# Altium PCB SIM7020_mp2128.PcbDoc (part 2 of 3)
Units mm, origin at the board's own origin, x right, y up, seen from the top; angles counter-clockwise.
Board outline 43.61 x 60.15 mm, 2 copper layers (Top Layer, Bottom Layer); 76 components, 59 nets, 247 pads, 355 vias.
Unrouted connection lines stored in the file: 2.
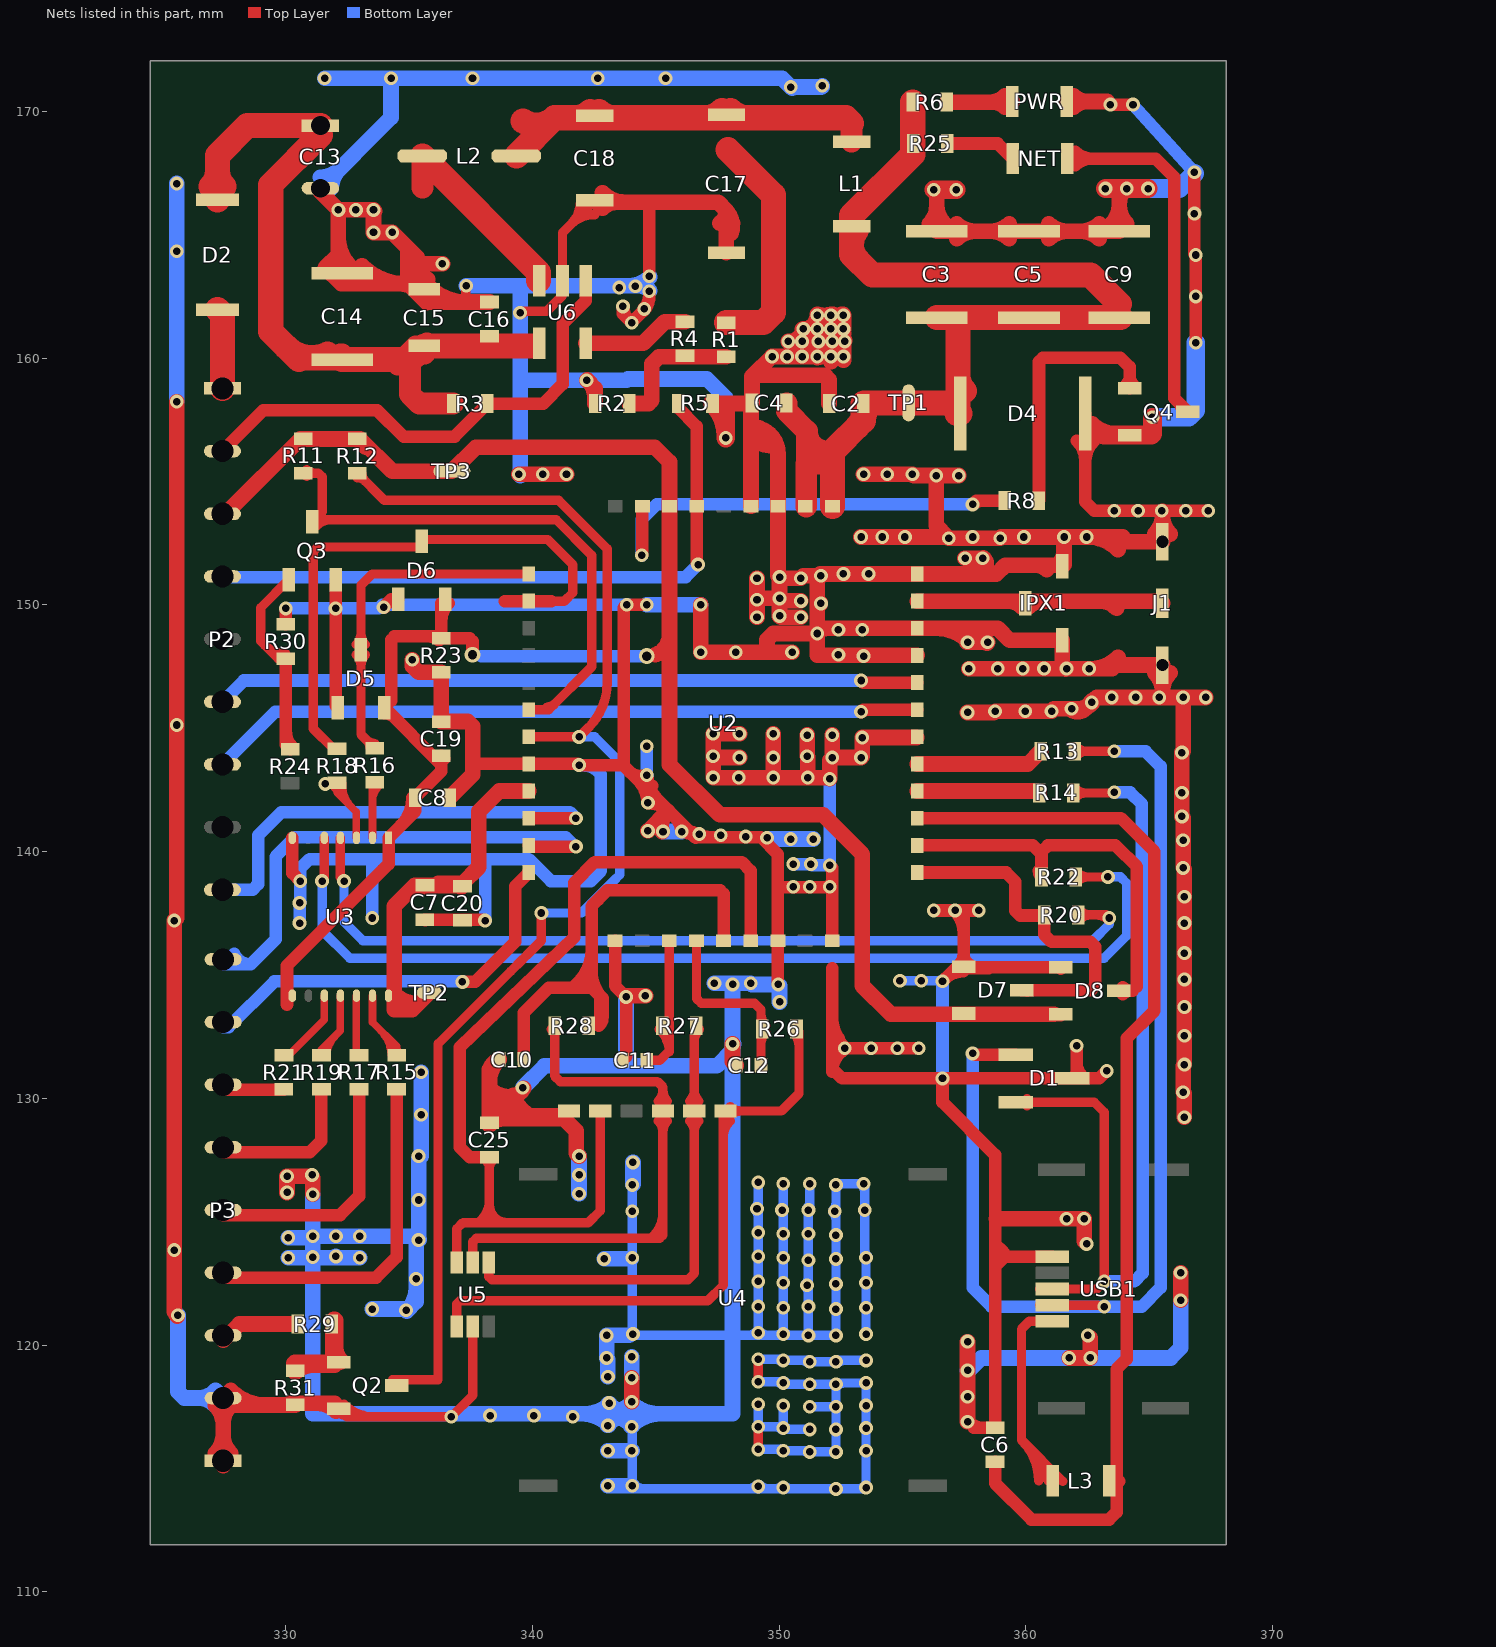
[diagram p2: the nets of this part, all layers, seen from the top]

## Via types
v1: diameter 0.559, hole 0.305, Top Layer to Bottom Layer, 353 vias
v2: diameter 0.635, hole 0.381, Top Layer to Bottom Layer, 2 vias

## Nets (pads, with @x,y where several pads share a name; then routed paths per layer and width w, separated by ;. In a path a pad name is that pad's centre, name@x,y a point inside that pad or via, vN(x,y) a via of type N, cw(c..) or ccw(c..) an arc to the next point about the centre after c; other vN are vias at no path point) (continued)
GND: C2.1 C3.2 C4.1 C5.2 C6.2 C7.2 C8.2 C9.2 C10.2 C11.1 C12.1 C13.2 C14.2 C15.2 C16.1 C17.2 C18.1 C19.2 C20.2 C25.1 D1.3 D4.1 D5.1 D6.1 D7.1 D8.1 IPX1.1 IPX1.3 J1.2 P3.1 P3.2 PWR.2 Q2.1 Q3.1 Q4.1 R2.2 R5.1 R23.1 R30.2 R31.1 U2.8 U2.13 U2.19 U2.21 U2.27 U2.30 U2.31 U2.33 U2.36 U2.37 U3.7 U4.1 U5.2 U6.2 USB1.5 | length 855.7
  Top Layer w0.381: Q2.1@331.971,117.643 Q2.1@332.012,117.602 ; Q2.1@332.088,117.328 ccw(c332.653,117.893) 332.653,117.094 ; Q2.1@332.358,117.597 ccw(c333.573,118.813) 333.573,117.094 ; 332.469,117.094 v1(336.707,117.094) 337.581,117.968 U5.2@337.581,120.752 ; 337.287,162.281 v1@337.287,162.738 ; v1@339.496,161.9 340.563,161.9 341.213,162.55 U6.2@341.213,163.144 341.213,165.09 C18.1@342.519,166.395 ; v1@339.559,161.786 cw(c339.834,161.512) 339.834,161.9 ; C18.1@341.947,166.395 cw(c340.568,166.395) 341.543,165.42 cw(c342.519,164.444) 342.519,165.824 ; v1(349.148,115.773) v1(349.148,116.688) ; v1(349.148,118.516) v1(349.148,119.431)
  Top Layer w0.508: R30.2@329.998,149.212 v1@329.998,149.858 ; U3.7@330.262,140.564 330.262,139.13 v1(330.581,138.811) ; Q3.1@332.014,151.022 v1(332.014,149.86) 332.014,145.921 D5.1@332.095,145.84 ; v1(333.959,149.911) 334.283,150.234 D6.1@334.559,150.234 ccw(c334.559,149.571) v1@333.981,149.898 ; C7.2@335.659,137.224 C7.2@335.634,137.249 v1@338.036,137.249 ; 337.718,143.561 337.722,143.557 U2.8@339.852,143.557 v1@341.837,143.557 ; C25.1@338.252,129.007 C25.1@338.252,129.083 ; C25.1@338.328,129.235 338.404,129.235 338.772,129.603 ; C25.1@338.379,129.007 cw(c338.869,129.007) 338.522,129.353 ; 338.582,129.997 ccw(c339.073,129.997) 338.726,129.65 338.772,129.603 ; v1(339.598,130.429) 339.23,130.061 338.772,129.603 ; v1(341.884,143.51) 343.662,143.51 ; U2.13@343.344,136.398 343.344,134.557 v1(343.789,134.112) 343.789,131.699 C11.1@343.637,131.547 ; v1(343.662,162.103) 343.662,161.798 v1(344.018,161.442) ; v1@343.687,162.1 ccw(c344.304,162.033) v1@343.865,161.595 ; 343.69,149.38 343.69,149.098 ; 343.941,143.231 ccw(c344.35,143.639) v1@344.616,143.126 ; 344.145,143.104 ccw(c344.329,143.104) 344.198,142.974 ; 344.275,142.897 cw(c343.365,141.986) v1@344.653,141.986 ; 344.432,142.74 ccw(c344.685,142.992) 344.849,142.675 ; v1@344.508,162.019 ccw(c343.974,162.553) v1@344.729,162.553 ; v1@344.509,162.021 ccw(c344.114,162.492) v1@344.729,162.492 ; v1@344.526,161.95 v1(344.018,161.442) ; v1(344.627,150.012) v1(343.814,150.012) 343.69,149.888 343.69,149.098 ; v1@344.653,143.104 ccw(c346.063,143.104) 345.066,142.106 ; v1@344.678,141.961 cw(c344.678,140.673) 345.589,141.583 ; v1(344.729,162.712) v1@344.729,162.492 ; v1(344.729,163.322) 344.729,166.268 ; 345.791,141.381 cw(c345.227,140.818) v1@346.024,140.818 ; v1@346.05,140.792 cw(c346.05,139.995) v1@346.613,140.559 ; v1@346.197,140.975 ccw(c346.761,141.539) v1@346.761,140.741 ; v1@346.779,140.734 ccw(c347.129,141.084) 347.129,140.589 ; v1@349.944,134.638 U2.19@349.944,136.398 349.944,139.895 349.25,140.589 346.583,140.589 343.662,143.51 ; 350.012,138.557 v1@351.917,138.557 ; v1@352.026,138.564 cw(c351.742,138.281) 352.144,138.281 ; v1@352.026,138.6 ccw(c351.742,138.884) 352.144,138.884 ; v1@352.026,139.428 cw(c351.742,139.144) 352.144,139.144 ; 352.144,131.071 cw(c353.243,131.071) v1@352.667,132.008 ; 352.144,131.98 cw(c352.684,131.98) 352.401,132.44 ; 352.144,132.095 ccw(c352.72,132.095) 352.312,131.688 ; 352.144,133.322 ccw(c353.946,133.322) v1@352.672,132.047 ; 352.144,135.282 352.144,132.029 ; U2.21@352.144,136.398 v1@352.144,139.346 ; v1(355.651,132.029) v1(354.787,132.029) v1(353.72,132.029) v1(352.654,132.029) 352.144,132.029 ; v1(356.26,137.617) v1(357.124,137.617) v1(358.089,137.617) ; v1(356.616,134.747) 357.185,135.316 361.359,135.316 D8.1@361.41,135.265 ; v1@356.708,134.839 cw(c357.448,134.099) D7.1@357.448,135.145 ; v1@357.106,137.599 cw(c356.22,136.713) 357.473,136.713 ; D7.1@357.334,135.48 ccw(c357,135.815) 357.473,135.815 ccw(c357.946,135.815) D7.1@357.612,135.48 ; D7.1@357.473,135.341 357.473,137.509 ; v1@357.65,116.909 ccw(c358.276,117.535) 358.276,116.649 ; D7.1@357.735,135.282 358.494,135.282 ; 357.873,116.649 C6.2@358.751,116.649 358.751,123.192 ; 358.033,135.316 cw(c358.033,135.876) 357.637,135.48 ccw(c358.114,135.957) 358.114,135.282 ; USB1.5@361.061,123.583 359.142,123.583 ; 362.052,131.454 ccw(c362.835,131.454) D1.3@362.281,130.9 ; v1(362.052,132.131) 362.052,130.988 D1.3@361.874,130.81 ; 362.056,156.659 cw(c361.21,155.812) 362.407,155.812 cw(c363.605,155.812) 362.758,156.659 ; D4.1@362.407,157.759 362.407,154.178 362.763,153.822 v1(363.576,153.822) v1(364.541,153.822) v1(365.506,153.822) v1(366.471,153.822) v1(367.386,153.822) ; v1(363.271,131.115) 362.966,130.81 D1.3@361.874,130.81 ; v1(363.423,170.282) v1(364.338,170.282) ; v1@366.827,164.236 v1(366.827,165.862) v1(366.827,167.538) ; v1(366.878,160.63) v1(366.878,162.509) v1(366.878,164.186) ; 343.662,143.51 343.69,143.538 343.69,149.098 ; v1(344.018,161.442) cw(c344.14,161.442) v1@344.054,161.529 ; v1(344.018,161.442) cw(c344.14,161.442) v1@344.054,161.529 ; v1(344.018,161.442) cw(c344.14,161.442) v1@344.054,161.529 ; v1(344.018,161.442) cw(c344.14,161.442) v1@344.054,161.529 ; v1(344.018,161.442) cw(c344.14,161.442) v1@344.054,161.529 ; v1(344.018,161.442) cw(c344.14,161.442) v1@344.054,161.529 ; v1(344.018,161.442) cw(c344.14,161.442) v1@344.054,161.529 ; v1@344.49,161.914 ccw(c344.403,162.001) v1(344.526,162.001) ; v1@344.49,161.914 ccw(c344.403,162.001) v1(344.526,162.001) ; v1@344.49,161.914 ccw(c344.403,162.001) v1(344.526,162.001) ; v1@344.49,161.914 ccw(c344.403,162.001) v1(344.526,162.001) ; v1@344.49,161.914 ccw(c343.912,162.492) v1@344.729,162.492 ; 352.144,132.029 352.144,131.218 352.552,130.81 v1(356.616,130.81) ; v1(356.616,130.81) 356.616,129.845 358.751,127.71 358.751,124.104 ; v1(356.616,130.81) D1.3@361.874,130.81 ; 358.751,123.192 359.142,123.583 ; 358.751,123.192 358.751,124.104 ; 358.751,124.104 359.05,123.805 cw(c358.828,123.583) 359.142,123.583
  Top Layer w0.635: v1@325.476,121.361 v1(325.476,123.85) v1(325.476,137.211) ; 325.476,121.485 ccw(c325.904,121.485) v1@325.601,121.182 ; v1@325.577,137.312 v1(325.577,145.136) v1(325.577,158.242) ; 327.151,115.622 ccw(c326.413,116.36) 327.457,116.36 ccw(c328.501,116.36) 327.763,115.622 ; 327.151,117.55 cw(c326.413,116.812) 327.457,116.812 cw(c328.501,116.812) 327.763,117.55 ; P3.1@327.457,115.113 327.457,117.653 327.533,117.577 R31.1@330.378,117.577 ; 327.763,118.162 ccw(c329.175,119.575) 329.175,117.577 ; v1(330.048,126.187) v1(330.048,126.848) v1@331.013,126.848 ; R31.1@330.164,117.643 Q2.1@331.971,117.643 ; v1(331.089,126.111) v1@331.089,126.771 ; 331.252,117.643 cw(c331.252,116.542) Q2.1@332.03,117.32 ; C13.2@331.4,166.893 331.4,166.745 v1(332.13,166.014) ; 332.13,164.856 ccw(c333.695,164.856) 332.589,163.75 ; 332.395,163.862 cw(c332.487,164.206) 332.13,164.206 ; 333.089,163.75 ccw(c334.857,165.518) 334.857,163.017 ; v1@333.604,165.964 v1(333.553,166.014) ; 334.6,163.017 cw(c334.6,161.904) C15.2@335.387,162.691 ; v1(335.128,147.777) 335.128,147.523 335.382,147.269 R23.1@336.296,147.269 ; C15.2@335.325,162.78 ccw(c334.951,162.605) 334.951,163.017 ; 335.331,164.084 334.951,164.463 ; 335.748,163.202 cw(c336.348,164.463) 334.951,164.463 ; C15.2@335.837,162.885 ccw(c337.287,164.32) 337.287,162.281 ; R23.1@336.298,147.268 C19.2@336.298,145.275 337.375,145.275 337.57,145.081 337.57,143.709 ; v1(336.347,163.83) 334.951,163.83 ; C8.2@336.639,142.188 337.57,143.118 337.57,143.557 ; 337.57,143.561 337.57,143.709 ; 337.57,143.916 337.57,143.709 ; C25.1@338.252,129.007 338.252,130.404 ; 338.252,130.656 cw(c339.565,130.656) C10.2@338.636,131.584 ; 338.252,131.011 cw(c338.874,131.011) C10.2@338.642,131.588 ; C16.1@338.252,162.281 337.287,162.281 ; C10.2@338.649,131.572 338.252,131.175 338.252,130.404 ; 339.23,130.061 339.08,130.061 ; v1(339.446,155.296) v1(340.411,155.296) v1(341.376,155.296) ; v1@339.633,130.413 cw(c339.08,130.671) 339.08,130.061 ; U4.1@341.219,129.235 341.772,128.682 341.772,127.772 v1(341.884,127.66) ; v1@342.202,159.106 342.532,158.775 R2.2@342.532,158.167 ; v1@342.216,159.133 cw(c341.453,158.37) R2.2@342.532,158.37 ; C18.1@342.519,166.319 347.523,166.319 347.853,165.989 ; 342.833,166.081 cw(c343.408,165.506) 343.408,166.319 ; 342.833,166.71 ccw(c343.776,167.652) 343.776,166.319 ; v1@343.84,134.163 v1(344.576,134.163) ; v1(344.018,117.704) v1(344.018,118.669) ; v1(344.678,140.843) 345.473,141.638 ccw(c346.08,141.031) v1@345.251,140.808 ; v1(346.812,150.012) v1(346.812,148.082) v1(348.234,148.082) 349.504,148.082 ; R5.1@347.294,158.166 C4.1@348.834,158.166 ; v1@347.37,143.815 v1(348.386,143.815) ; 347.596,165.479 ccw(c347.219,165.989) 347.853,165.989 ; 347.82,166.022 cw(c347.16,165.363) 348.045,165.067 ; C17.2@347.853,164.281 347.853,165.989 ; C12.1@348.107,131.496 v1(348.107,132.207) ; 348.107,131.669 ccw(c348.585,131.669) C12.1@348.247,131.331 ; 348.11,165.479 cw(c348.487,165.989) 347.853,165.989 ; v1(348.386,144.78) v1(347.32,144.78) v1(347.32,143.866) v1(347.32,143.002) v1(348.361,143.002) v1(349.758,143.002) ; C4.1@348.834,158.148 348.851,158.148 348.851,157.226 ; U2.37@348.851,154 348.851,157.226 ; C4.1@348.894,158.191 348.894,159.258 348.944,159.307 ; v1(349.098,149.504) v1(349.098,150.216) v1(349.098,151.079) ; v1@349.148,150.266 v1(350.012,150.266) ; 349.646,159.307 350.012,159.307 ; v1(349.758,144.78) v1(349.758,143.815) v1(349.758,143.002) ; 349.758,156.464 349.613,156.464 cw(c349.613,157.226) 348.851,157.226 ; v1@349.951,151.191 U2.36@349.951,154 349.951,156.126 ccw(c348.851,156.126) 348.851,157.226 ; v1(350.012,149.555) v1(350.012,150.266) ; v1(350.012,151.13) v1(350.012,150.266) ; v1@350.063,149.504 v1(350.876,149.504) ; v1@350.063,151.079 v1(350.876,151.079) ; v1@350.114,150.165 v1(350.876,150.165) ; v1(350.52,148.082) 349.504,148.082 ; v1@350.89,160.69 cw(c351.536,160.52) v1(351.536,161.188) ; v1@350.94,161.179 ccw(c351.587,161.349) v1(351.587,160.68) v1(350.926,160.68) ; v1@350.977,151.181 v1@351.587,151.181 ; v1@350.98,161.15 ccw(c350.938,161.747) v1(351.536,161.747) ; v1@351.014,161.179 cw(c350.368,161.349) v1(350.368,160.68) v1(350.926,160.68) ; v1(351.13,143.866) v1(351.13,144.729) ; v1@351.155,143.84 v1(351.155,143.002) ; v1@351.509,148.871 cw(c351.958,148.422) 351.958,149.057 ; 351.536,149.787 cw(c351.964,149.787) v1@351.661,150.09 ; 351.536,150.339 ccw(c351.964,150.339) v1@351.661,150.036 ; 351.536,150.905 cw(c351.964,150.905) v1@351.661,151.208 ; v1(351.536,160.071) v1(350.926,160.071) v1(350.317,160.071) v1(349.707,160.071) 348.944,159.307 ; v1@351.536,160.957 cw(c352.434,160.957) v1@352.08,161.782 ; v1@351.539,160.033 ccw(c351.497,160.63) v1@352.095,160.63 ; v1@351.539,161.15 ccw(c351.497,161.747) v1(352.095,161.747) ; v1@351.539,161.785 cw(c351.497,161.188) v1(352.095,161.188) v1(352.095,161.747) ; v1@351.551,161.782 cw(c351.197,160.957) v1@352.095,160.957 ; v1@351.573,161.179 cw(c350.926,161.349) v1(350.926,160.68) ; v1@351.574,161.745 cw(c350.977,161.787) v1(350.977,161.188) ; v1@351.59,160.718 cw(c351.544,160.17) v1@352.095,160.17 ; v1@351.605,160.714 cw(c351.152,159.887) v1@352.095,159.887 ; v1@351.624,160.69 ccw(c350.977,160.52) v1(350.977,161.188) ; v1(351.688,151.181) v1@351.587,151.181 ; v1@351.704,149.057 U2.31@355.592,149.057 358.242,149.057 ; v1@351.993,143.002 v1(351.155,143.002) ; C2.1@352.019,158.166 352.019,159.131 351.842,159.307 350.012,159.307 ; v1(352.044,142.951) v1@352.044,143.713 ; v1@352.092,161.15 cw(c352.134,161.747) v1(351.536,161.747) ; v1@352.092,161.785 ccw(c352.134,161.188) v1(351.536,161.188) ; v1@352.095,159.853 cw(c353.05,159.853) v1@352.637,160.715 ; v1(352.095,160.071) v1@352.095,160.63 ; v1@352.095,160.119 cw(c352.696,160.119) v1@352.651,160.718 ; v1@352.095,160.992 cw(c352.975,160.992) v1@352.586,161.781 ; v1@352.095,161.239 cw(c352.642,161.239) v1@352.6,161.785 ; v1@352.098,161.785 cw(c352.055,161.239) v1@352.603,161.239 ; v1@352.101,160.033 ccw(c351.998,160.63) 352.603,160.63 v1(352.603,160.071) ; v1@352.101,161.151 ccw(c351.998,161.747) v1(352.603,161.747) v1(352.603,161.188) ; v1@352.112,161.781 cw(c351.723,160.992) v1@352.603,160.992 ; v1(352.146,144.729) v1(352.146,143.815) v1(353.314,143.815) ; v1@352.149,160.718 cw(c352.103,160.22) v1@352.603,160.22 ; v1@352.166,160.713 cw(c351.662,159.918) v1@352.603,159.918 ; v1@352.596,160.033 cw(c352.7,160.63) v1@352.095,160.63 ; v1@352.596,161.151 cw(c352.7,161.747) v1(352.095,161.747) ; v1(353.314,152.756) v1(354.178,152.756) v1(355.092,152.756) v1@356.819,152.756 ; v1@353.365,143.866 v1(353.365,144.628) U2.27@355.562,144.628 ; v1(353.416,155.296) v1(354.381,155.296) v1(355.397,155.296) ; v1@355.448,155.245 v1(356.362,155.245) ; U2.30@355.592,147.957 351.536,147.957 v1(351.536,148.844) ; 356.082,165.451 ccw(c355.343,166.19) 356.387,166.19 ccw(c357.432,166.19) 356.693,165.451 ; 356.351,149.057 cw(c356.351,147.208) v1@357.659,148.515 ; v1@356.387,166.7 C3.2@356.387,165.146 C5.2@360.121,165.146 C9.2@363.779,165.146 363.779,166.573 ; 357.193,164.84 cw(c357.932,164.101) 357.932,165.146 cw(c357.932,166.19) 357.193,165.451 ; v1(357.276,155.245) v1(356.362,155.245) ; v1(357.53,151.892) v1(358.242,151.892) ; v1@357.594,148.494 cw(c358.242,148.403) 358.242,149.057 ; v1(357.632,116.891) v1(357.632,117.907) v1(357.632,118.974) v1(357.632,120.142) ; v1(357.632,145.644) v1@358.699,145.644 ; v1(357.632,148.488) v1(358.445,148.488) ; v1(357.683,147.422) v1(358.851,147.422) v1(359.867,147.422) v1(360.731,147.422) v1(361.645,147.422) v1(362.56,147.422) 363.483,147.422 ; 358.242,148.692 358.242,149.057 ; 358.242,148.887 ccw(c358.843,148.887) v1@358.418,148.461 ; v1@358.269,151.919 cw(c357.966,151.616) 358.394,151.616 ; v1@358.394,151.74 358.394,151.257 ; v1(358.75,145.694) v1(359.969,145.694) v1(361.036,145.694) ; 358.802,125.12 v1(361.645,125.12) v1(362.356,125.12) v1@362.356,124.206 ; v1(358.953,152.705) v1(356.87,152.705) v1@356.819,152.756 ; v1@359.004,152.756 v1(359.918,152.756) v1(361.544,152.756) ; 359.315,164.84 ccw(c358.577,164.101) 358.577,165.146 ccw(c358.577,166.19) 359.315,165.451 ; 360.411,151.613 cw(c360.411,151.008) 360.838,151.436 ; 360.927,164.84 cw(c361.665,164.101) 361.665,165.146 cw(c361.665,166.19) 360.927,165.451 ; v1@361.137,145.796 v1(361.848,145.796) 362.407,145.796 ; IPX1.3@361.338,151.694 ccw(c360.843,152.189) 361.544,152.189 ; IPX1.3@361.419,151.613 359.156,151.613 358.8,151.257 358.394,151.257 ; v1@361.467,147.599 IPX1.1@361.467,148.565 359.344,148.565 358.851,149.057 358.242,149.057 ; 361.467,147.759 ccw(c361.982,147.759) v1@361.618,147.395 ; IPX1.3@361.467,151.565 361.544,151.641 v1(361.544,152.756) ; PWR.2@361.646,170.407 v1@363.298,170.407 ; v1(361.747,119.482) v1(362.61,119.482) v1@362.61,120.294 ; v1@361.824,145.766 ccw(c362.099,146.104) 362.407,145.796 ; v1@361.845,145.758 ccw(c361.945,146.767) v1(362.661,146.05) ; 361.936,170.182 cw(c362.478,169.64) 362.478,170.407 cw(c362.478,171.173) 361.936,170.631 ; 362.14,145.796 ccw(c362.14,146.571) v1@362.688,146.023 ; v1@362.509,152.756 cw(c362.509,151.03) 363.729,152.25 ; v1@362.625,147.422 ccw(c362.625,148.983) 363.729,147.879 ; v1@362.634,146.077 cw(c363.06,145.651) 363.06,146.253 ; 362.973,164.84 ccw(c362.235,164.101) 362.235,165.146 ccw(c362.235,166.19) 362.973,165.451 ; 363.473,165.451 ccw(c362.735,166.19) 363.779,166.19 ccw(c364.823,166.19) 364.085,165.451 ; 363.483,147.565 J1.2@365.531,147.565 v1@365.531,146.38 ; 363.779,166.234 cw(c364.727,166.234) v1@364.057,166.905 ; 363.919,152.565 J1.2@365.531,152.565 v1@365.531,153.797 ; 363.919,152.756 v1(362.458,152.756) v1(361.544,152.756) ; 365.217,147.25 cw(c364.458,146.491) 365.531,146.491 cw(c366.605,146.491) 365.846,147.25 ; 365.217,152.879 ccw(c364.458,153.638) 365.531,153.638 ccw(c366.605,153.638) 365.846,152.879 ; v1(366.268,121.818) v1(366.268,122.936) ; v1(366.319,141.427) v1(366.319,142.392) v1(366.319,144.018) ; v1(366.37,130.251) v1@366.37,131.318 ; v1(366.37,139.344) v1(366.37,140.462) v1@366.37,141.376 ; v1@366.37,144.069 v1(366.37,146.253) ; v1(366.42,129.235) v1@366.42,130.2 ; v1(366.42,131.369) v1(366.42,132.537) v1(366.42,133.706) v1(366.42,134.823) v1(366.42,135.89) v1(366.42,137.109) v1(366.42,138.176) v1@366.42,139.294 ; v1(367.284,146.253) v1(366.37,146.253) ; 332.13,164.206 v1(332.13,166.014) ; 332.13,164.206 331.597,163.672 332.252,163.017 334.951,163.017 ; v1(332.13,166.014) v1(332.842,166.014) v1(333.553,166.014) ; v1(333.553,166.014) v1(333.553,165.1) v1(334.315,165.1) 334.951,164.463 ; 334.951,163.017 335.713,162.255 335.739,162.281 337.287,162.281 ; 334.951,163.017 334.951,163.83 ; 334.951,163.83 334.951,164.463 ; 338.252,130.404 ccw(c339.08,131.231) 339.08,130.061 ; 338.252,130.404 ccw(c339.08,131.231) 339.08,130.061 ; 348.944,159.307 350.012,159.307 ; 349.504,148.082 349.504,148.59 349.758,148.844 v1(351.536,148.844) ; v1(349.758,143.002) v1(351.155,143.002) ; v1(350.977,161.188) v1(351.536,161.188) ; v1(351.536,148.844) 351.536,151.13 v1@351.587,151.181 ; v1(351.536,161.188) v1(351.536,161.747) ; v1@351.587,151.181 351.663,151.257 v1(352.603,151.257) v1(353.619,151.257) U2.33@355.592,151.257 358.394,151.257 ; v1(356.362,155.245) 356.362,153.213 v1@356.819,152.756 ; 362.407,145.796 v1(362.661,146.05) ; v1(362.661,146.05) 362.864,146.253 v1(363.474,146.253) v1(364.439,146.253) v1(365.404,146.253) v1(366.37,146.253)
  Top Layer w0.762: C25.1@338.252,129.007 cw(c338.804,128.455) 338.804,129.235 ; C25.1@338.404,129.235 339.801,129.235 ; 339.23,130.061 ccw(c339.843,130.061) 339.409,129.627 339.801,129.235 ; U4.1@341.219,129.235 339.801,129.235 ; v1(347.828,156.769) 347.828,158.115 ; v1@347.828,156.878 ccw(c346.006,156.878) R5.1@347.294,158.166 cw(c347.292,157.63) 347.828,157.63 ; v1(356.26,166.827) v1(357.175,166.827) ; 362.668,157.27 ccw(c363.597,158.199) 363.597,156.886 ; 362.728,157.192 ccw(c363.256,157.493) 363.256,156.886 Q4.1@364.204,156.886 365.084,156.886 365.125,156.926 v1(365.125,157.607) ; v1(363.22,166.878) v1(364.084,166.878) v1(364.947,166.878)
  Bottom Layer w0.381: v1@343.916,120.396 348.107,120.396 v1(351.18,120.396) ; v1@343.967,120.447 v1(344.068,120.447) ; 344.043,117.094 344.043,115.722 v1(344.043,114.3) 344.17,114.173 v1(352.298,114.173) v1@353.466,114.173 ; v1@344.043,120.523 v1(344.043,123.546) v1(344.043,125.425) v1(344.043,126.492) ; v1@344.106,114.363 ccw(c344.564,114.821) 344.564,114.173 ; v1@344.131,120.51 ccw(c344.406,120.784) 344.406,120.396 ; 348.688,114.173 ccw(c348.688,114.735) v1@349.086,114.337 ; 348.688,120.396 ccw(c348.688,120.958) v1@349.086,120.56 ; v1@349.035,125.464 cw(c348.76,125.19) 349.148,125.19 ; v1@349.035,125.59 ccw(c348.76,125.864) 349.148,125.864 ; v1(349.148,115.773) v1@350.114,115.773 ; v1(349.148,117.602) v1(349.148,116.688) 350.114,116.688 v1(350.164,116.637) v1(350.164,117.551) ; v1(349.148,118.516) v1@350.114,118.516 ; v1(349.148,119.431) v1@350.114,119.431 ; v1(349.148,120.498) v1(349.148,121.564) v1(349.148,122.58) v1(349.148,123.596) v1(349.148,124.562) v1(349.148,126.594) ; v1@349.211,114.337 ccw(c349.608,114.735) 349.608,114.173 ; v1@349.211,120.56 ccw(c349.608,120.958) 349.608,120.396 ; 349.827,114.173 ccw(c349.827,114.561) v1@350.102,114.287 ; 349.827,115.773 cw(c349.827,115.385) v1@350.102,115.66 ; 349.827,116.688 cw(c349.827,116.3) v1@350.102,116.574 ; 349.827,118.516 cw(c349.827,118.128) v1@350.102,118.403 ; 349.827,119.431 cw(c349.827,119.043) v1@350.102,119.317 ; 349.827,120.396 ccw(c349.827,120.784) v1@350.102,120.51 ; v1@350.051,125.413 cw(c349.776,125.139) 350.164,125.139 ; v1@350.051,125.539 ccw(c349.776,125.813) 350.164,125.813 ; v1(350.164,115.722) v1@351.18,115.722 ; v1(350.164,119.38) v1@351.18,119.38 ; v1(350.164,120.447) v1(350.164,121.514) v1(350.164,122.53) v1(350.164,123.546) v1(350.164,124.511) v1(350.164,126.543) ; v1@350.215,116.586 v1(351.231,116.586) ; v1@350.227,114.287 ccw(c350.502,114.561) 350.502,114.173 ; v1@350.227,116.7 ccw(c350.502,116.974) 350.502,116.586 ; v1@350.227,118.528 ccw(c350.502,118.803) 350.502,118.415 ; v1@350.227,120.51 ccw(c350.502,120.784) 350.502,120.396 ; v1@350.317,118.415 v1(351.231,118.415) v1(352.298,118.415) ; 350.894,115.722 cw(c350.894,115.334) v1@351.168,115.609 ; 350.894,119.38 cw(c350.894,118.992) v1@351.168,119.266 ; v1@351.067,122.365 cw(c350.792,122.091) 351.18,122.091 ; v1@351.067,122.491 ccw(c350.792,122.765) 351.18,122.765 ; v1@351.118,125.539 ccw(c350.843,125.813) 351.231,125.813 ; v1(351.18,125.476) v1(351.18,124.511) v1(351.18,123.444) v1(351.18,121.564) v1(351.18,120.396) ; v1(351.231,115.672) v1(352.298,115.672) v1(352.298,116.586) v1(352.298,117.5) ; v1(351.231,117.5) v1(352.298,117.5) ; v1(351.231,119.329) v1(352.298,119.329) ; v1@351.231,125.527 v1(351.231,126.543) ; v1@352.184,125.362 cw(c351.91,125.088) 352.298,125.088 ; v1@352.184,125.488 ccw(c351.91,125.762) 352.298,125.762 ; v1(352.298,126.492) v1(352.298,124.46) v1(352.298,123.495) v1(352.298,122.479) v1(352.298,121.463) v1(352.298,120.396) v1(351.18,120.396) ; v1@352.349,119.38 v1(353.517,119.38) ; v1@352.349,126.543 v1(353.416,126.543) ; v1@352.361,118.352 cw(c352.635,118.078) 352.635,118.466 ; v1@352.361,119.266 cw(c352.635,118.992) 352.635,119.38 ; v1@352.361,126.429 cw(c352.635,126.155) 352.635,126.543 ; 353.18,114.173 ccw(c353.18,114.561) v1@353.454,114.287 ; v1@353.353,126.48 cw(c353.078,126.206) 353.466,126.206 ; v1@353.466,123.596 v1(353.466,125.476) v1@353.466,126.492 ; 353.466,123.883 ccw(c353.854,123.883) v1@353.58,123.608 ; v1(353.517,114.224) v1(353.517,115.722) v1(353.517,116.637) v1(353.517,117.551) v1(353.517,118.466) 352.349,118.466 v1(352.298,118.415) ; v1(353.517,120.447) v1(353.517,121.514) v1(353.517,122.53) v1(353.517,123.546) ; v1(354.889,134.772) v1(355.752,134.772) v1@356.591,134.772 ; v1(352.298,117.5) v1(352.298,118.415)
  Bottom Layer w0.508: v1(329.997,149.86) v1(332.014,149.86) 333.756,149.86 333.908,150.012 v1(343.814,150.012) v1@343.941,150.012 ; v1(330.556,137.109) v1(330.556,137.922) ; v1@330.581,137.947 v1(330.581,138.811) 330.581,139.319 330.962,139.7 333.502,139.7 ; v1(333.502,137.312) 333.502,139.7 ; v1@333.977,149.893 cw(c334.266,149.604) 334.266,150.012 ; v1(338.074,137.211) 338.074,139.649 ; v1(341.884,143.51) 342.392,143.51 342.773,143.129 342.773,139.219 342.365,138.811 340.741,138.811 339.852,139.7 333.502,139.7 ; v1@341.889,143.485 cw(c342.054,142.664) 342.646,143.256 ; v1(344.627,143.104) v1(344.627,144.272) ; v1(344.678,141.986) v1@344.678,143.053 ; v1(350.571,139.497) v1(351.282,139.497) ; v1@351.333,139.446 v1(352.044,139.446) v1(352.044,142.951) v1@352.044,143.002 ; v1(356.616,130.81) v1(356.616,134.747) ; v1(364.338,170.282) v1(366.827,167.538)
  Bottom Layer w0.635: v1(325.577,158.242) v1(325.577,164.338) v1(325.577,167.081) ; v1(325.628,121.209) 325.628,118.11 325.882,117.856 P3.2@327.457,117.856 327.203,118.11 ; 327.151,117.55 ccw(c326.413,116.812) 326.413,117.856 ccw(c326.413,118.9) 327.151,118.162 ; v1(330.098,123.546) v1@331.089,123.546 ; v1(330.098,124.358) v1@331.089,124.358 ; v1(331.089,126.111) v1(331.089,124.409) ; C13.2@331.4,166.893 334.264,169.757 v1(334.264,171.348) ; 331.4,167.337 ccw(c331.4,168.41) 332.158,167.651 ccw(c332.917,166.893) C13.2@331.844,166.893 ; v1(331.572,171.348) v1(334.264,171.348) ; v1(332.029,123.596) 331.978,123.546 v1@331.089,123.546 ; v1@332.08,123.546 v1(332.994,123.546) ; v1(333.502,121.463) 334.823,121.463 v1(334.874,121.412) 334.924,121.412 335.28,121.768 v1(335.28,122.682) v1@335.28,124.155 ; v1@334.901,121.385 ccw(c333.984,122.301) 335.28,122.301 ; 335.106,124.409 cw(c335.106,123.981) v1@335.409,124.284 ; v1(335.483,131.064) v1(335.483,129.337) 335.483,127.66 335.382,127.559 v1(335.382,125.882) v1(335.382,124.257) 335.229,124.409 v1(332.994,124.409) v1(332.029,124.409) v1(331.089,124.409) ; v1(337.312,162.941) 344.5,162.941 ; v1@339.496,155.245 339.496,159.106 ; 339.496,162.916 v1(339.496,161.849) 339.496,159.106 ; v1(339.598,130.429) 340.487,131.318 343.789,131.318 ; v1(341.884,126.136) v1(341.884,126.898) v1(341.884,127.66) ; 341.979,117.221 cw(c341.979,115.665) v1@343.079,116.765 ; 342.153,117.221 ccw(c342.153,118.603) v1@343.13,117.626 ; 342.822,117.221 cw(c342.822,115.492) v1@344.045,116.715 ; v1(342.9,123.495) v1@343.992,123.495 ; 342.944,117.221 ccw(c342.944,118.777) v1@344.045,117.677 ; v1(343.002,119.482) v1(343.002,120.396) v1@343.916,120.396 ; v1@343.025,116.765 cw(c344.126,115.665) 344.126,117.221 ; v1(343.052,114.3) v1(344.043,114.3) ; v1(343.052,115.722) v1(344.018,115.722) v1@344.043,115.722 ; v1(343.052,118.72) v1@343.052,119.431 ; v1@343.076,117.626 ccw(c344.054,118.603) 344.054,117.221 ; v1(343.789,134.112) 343.789,131.318 ; 343.814,159.106 v1(342.189,159.106) 339.496,159.106 ; 343.865,159.156 347.066,159.156 347.828,158.394 v1(347.828,156.769) ; v1@343.901,162.941 ccw(c343.901,164.15) v1@344.756,163.295 ; v1@343.991,116.715 cw(c345.213,115.492) 345.213,117.221 ; v1@343.991,117.677 ccw(c345.091,118.777) 345.091,117.221 ; v1(344.018,118.669) v1(344.018,119.532) ; v1@344.068,126.517 v1(344.068,127.406) ; v1@344.269,162.941 cw(c344.269,162.252) v1@344.756,162.739 ; v1(344.627,150.012) v1(346.812,150.012) ; v1(345.288,140.818) v1(346.05,140.818) ; v1(347.37,134.671) v1@348.158,134.671 ; 347.992,131.838 ccw(c347.624,132.207) v1@348.145,132.207 ; v1(348.844,134.671) v1@348.158,134.671 ; v1@348.894,134.62 v1(349.961,134.62) ; v1@349.555,140.513 v1(350.469,140.513) v1(351.384,140.513) ; v1(350.012,133.909) v1@350.012,134.569 ; v1@350.52,170.942 v1(350.469,170.993) ; v1(351.739,171.044) cw(c351.688,171.044) 351.688,170.993 v1(350.469,170.993) ; v1(357.632,118.974) 357.683,118.974 358.191,119.482 v1(361.747,119.482) ; v1(362.61,119.482) 365.862,119.482 366.268,119.888 v1(366.268,121.818) ; v1@331.089,123.546 v1(331.089,123.571) v1@331.089,124.358 ; v1@331.089,123.546 331.089,117.221 348.107,117.221 348.107,120.396 v1@348.107,131.953 ; v1@331.089,124.358 v1(331.089,124.409) ; v1(334.264,171.348) v1(337.566,171.348) v1(342.646,171.348) v1(345.389,171.348) 350.114,171.348 v1(350.469,170.993) ; 343.789,131.318 347.472,131.318 v1@348.107,131.953 ; v1@348.107,131.953 v1(348.107,132.207) v1(348.107,134.62) cw(c348.158,134.62) v1@348.158,134.671
  Bottom Layer w0.762: v1(364.947,166.878) 366.217,166.878 v1@366.827,167.488 ; v1(365.125,157.607) 366.598,157.607 366.878,157.886 v1(366.878,160.63)
  other v1: 350.164,114.224 349.148,114.275 344.018,116.688 343.052,116.738 341.63,117.094 338.277,117.145 340.055,117.145 343.103,117.653 350.164,118.466 362.509,120.396 351.13,122.428 362.458,124.104 352.247,125.425 350.114,125.476 349.098,125.527 331.064,126.898 335.382,127.66 350.571,138.582 351.231,138.582 352.044,138.582 349.504,140.564 348.64,140.614 347.624,140.665 346.761,140.716 353.416,147.93 352.4,147.98 352.4,148.996 353.365,148.996 351.688,150.063 357.835,152.756 352.146,160.68 352.654,160.68 343.51,162.865 344.17,162.916
GPIO0: P2.9 U2.10 | length 18.8
  Top Layer w0.508: U2.10@339.852,141.357 v1(341.757,141.357)
  Bottom Layer w0.508: P2.9@327.431,138.455 328.651,138.455 328.879,138.684 328.879,140.665 329.819,141.605 341.509,141.605 v1(341.757,141.357)
GPIO1: P2.6 U2.29 | length 28.4
  Top Layer w0.508: v1@353.396,146.857 U2.29@355.592,146.857
  Bottom Layer w0.508: P2.6@327.431,146.075 328.295,146.939 v1(353.314,146.939)
NetC13_1: C13.1 C14.1 C15.1 C16.2 D2.2 R3.1 U6.4 | length 35.7
  Top Layer w0.889: 330.53,159.944 C14.1@332.283,159.944 ; 331.4,169.043 C13.1@331.4,169.433 ; C14.1@332.207,160.147 C14.1@332.283,160.147 ; 334.547,159.744 cw(c335.612,158.679) 335.612,160.185 ; 334.747,159.944 335.026,160.223 ; C15.1@335.28,160.477 335.026,160.223 ; C15.1@335.612,160.503 C15.1@335.713,160.604 ; R3.1@336.779,158.166 335.407,158.166 335.026,158.547 335.026,160.223
  Top Layer w1.016: 326.969,166.955 ccw(c326.342,167.582) 327.228,167.582 ccw(c328.114,167.582) 327.488,166.955 ; D2.2@327.228,166.421 327.228,168.224 328.437,169.433 C13.1@331.4,169.433 ; 330.014,160.46 ccw(c331.06,161.507) C14.1@331.681,160.163 ; 330.53,159.944 329.387,161.087 329.387,167.03 331.4,169.043 ; C14.1@332.283,159.944 334.747,159.944 ccw(c334.747,160.766) C15.1@335.496,160.428 ; C15.1@335.612,160.503 339.954,160.503
NetC17_1: C17.1 C18.2 L1.2 L2.1 R1.1 | length 28.9
  Top Layer w0.889: L1.2@352.933,168.783 352.933,169.52
  Top Layer w1.016: L2.1@339.344,168.199 340.893,169.748 ; 339.611,169.612 ccw(c340.168,170.474) 340.893,169.748 ; 341.722,169.748 ccw(c341.722,170.622) C18.2@342.339,170.004 ; C18.2@342.699,170.004 ccw(c343.316,170.622) 343.316,169.748 ; 346.962,169.748 ccw(c346.962,170.766) C17.1@347.682,170.046 ; R1.1@347.853,161.442 349.352,161.442 349.758,161.849 349.758,166.624 347.929,168.453 ; C17.1@348.024,170.046 ccw(c348.744,170.766) 348.744,169.748 ; 352.933,169.52 352.704,169.748 344.322,169.748 340.893,169.748
NetD1_1: D1.1 R13.1 USB1.2 | length 47.7
  Top Layer w0.381: USB1.2@360.553,121.626 USB1.2@361.061,121.626 361.071,121.615 v1@362.915,121.615 ; R13.1@361.975,144.069 v1(363.576,144.069) ; R13.1@362.11,143.934 cw(c362.435,143.609) 362.435,144.069 cw(c362.435,144.529) R13.1@362.11,144.204
  Top Layer w0.508: D1.1@359.588,131.775 v1@357.958,131.775 ; v1(357.835,131.826) cw(c357.835,131.653) v1@357.958,131.775 ; v1(357.835,131.826) ccw(c357.958,131.949) v1@357.958,131.775 ; v1(357.835,131.826) ccw(c357.958,131.949) v1@357.958,131.775
  Bottom Layer w0.508: v1(357.835,131.826) 357.835,122.326 358.597,121.564 364.693,121.564 365.455,122.326 365.455,143.459 364.846,144.069 v1(363.576,144.069)
  other v1: 363.169,121.564
NetD1_2: D1.2 R14.1 USB1.3 | length 38.5
  Top Layer w0.381: D1.2@359.588,129.845 362.763,129.845 363.169,129.438 v1(363.169,122.58) 362.864,122.276 USB1.3@361.061,122.276 USB1.3@360.553,122.276 ; D1.2@360.04,129.71 cw(c360.365,129.385) 360.365,129.845 cw(c360.365,130.305) D1.2@360.04,129.98 ; R14.1@361.925,142.381 v1@363.55,142.381 ; R14.1@362.059,142.246 cw(c362.385,141.921) 362.385,142.381 cw(c362.385,142.841) R14.1@362.059,142.516
  Bottom Layer w0.508: v1(363.169,122.58) 364.388,122.58 364.731,122.923 364.731,139.03 364.693,139.068 364.693,141.935 364.222,142.406 v1(363.576,142.406)
NetL2_2: L2.2 U6.3 | length 8.3
  Top Layer w0.889: 335.534,166.929 335.534,167.884 ; U6.3@340.248,163.485 340.263,163.469 U6.3@340.263,163.155
  Top Layer w1.016: L2.2@335.534,168.199 340.248,163.485 U6.3@340.248,163.155
NetL3_1: L3.1 USB1.1 | length 11.1
  Top Layer w0.381: 359.84,116.13 cw(c358.211,114.502) 360.515,114.502 ; 360.491,115.48 cw(c359.512,114.502) L3.1@360.896,114.502 ; USB1.1@361.061,120.976 360.142,120.976 359.816,120.65 359.816,116.154 361.493,114.478
NetNET_1: NET.1 R25.2 | length 2.9
  Top Layer w0.508: R25.2@356.806,168.705 358.852,168.705 NET.1@359.462,168.096
NetNET_2: NET.2 Q4.3 | length 16.2
  Top Layer w0.508: NET.2@361.672,168.096 365.254,168.096 366.014,167.335 366.014,158.376 Q4.3@366.554,157.836 ; 362.006,167.826 cw(c362.656,167.176) 362.656,168.096 cw(c362.656,169.015) 362.006,168.365 ; 366.177,158.213 cw(c365.799,157.836) Q4.3@366.333,157.836
NetPWR_1: PWR.1 R6.1 | length 3.9
  Top Layer w0.635: R6.1@356.794,170.383 359.412,170.383 PWR.1@359.436,170.407 ; 358.547,170.383 ccw(c358.547,171.231) 359.147,170.631 ; 358.662,170.383 cw(c358.662,169.698) 359.147,170.182
NetQ2_2: Q2.2 R29.2 R31.2 | length 4.6
  Top Layer w0.75: 330.379,119.24 331.971,119.24 331.971,119.543 R29.2@331.971,120.979 ; R31.2@330.384,118.957 cw(c331.068,118.272) 331.068,119.24 ; 331.971,119.864 ccw(c332.674,119.864) Q2.2@332.177,119.367
NetQ3_2: Q3.2 R24.2 R30.1 | length 9.4
  Top Layer w0.381: 329.151,148.369 ccw(c329.997,149.214) R30.1@329.997,148.018 ; R30.1@329.997,147.828 329.692,147.828 328.981,148.539 328.981,149.889 Q3.2@330.114,151.022
  Top Layer w0.508: 329.997,144.897 ccw(c330.916,144.897) R24.2@330.266,144.248 ; 329.997,147.549 329.997,144.337 R24.2@330.176,144.158
NetQ4_2: Q4.2 R8.2 | length 11.1
  Top Layer w0.508: R8.2@360.515,154.227 360.528,154.24 360.528,159.868 360.68,160.02 363.83,160.02 364.204,159.646 Q4.2@364.204,158.786 ; Q4.2@364.065,158.924 ccw(c363.731,159.259) 364.204,159.259 ccw(c364.677,159.259) Q4.2@364.343,158.924
NetR1_2: R1.2 R2.1 R4.1 | length 5.6
  Top Layer w0.635: R2.1@343.916,158.166 344.703,158.166 344.83,158.293 344.83,159.766 345.123,160.058 R1.2@347.851,160.058
NetR4_2: R4.2 U6.5 | length 4.4
  Top Layer w0.508: R4.2@346.14,161.442 R4.2@346.178,161.481
  Top Layer w0.635: U6.5@342.163,160.604 344.483,160.604 345.36,161.481 R4.2@346.178,161.481
NetR8_1: R8.1 U2.41 | length 18.9
  Top Layer w0.508: v1@344.451,152.046 U2.41@344.451,154 ; v1(357.835,154.076) 357.988,154.229 R8.1@359.131,154.229 ; v1@357.853,154.058 cw(c358.264,153.647) 358.264,154.229
  Bottom Layer w0.508: v1(344.424,152.019) 344.424,153.467 345.034,154.076 v1(357.835,154.076)
NetR15_1: R15.1 U3.13 | length 4.5
  Top Layer w0.305: U3.13@333.512,134.164 333.512,133.086 334.493,132.105 R15.1@334.493,131.75 ; 333.851,132.747 cw(c332.854,131.75) R15.1@334.264,131.75 ; 334.371,132.227 cw(c333.894,131.75) R15.1@334.569,131.75
NetR16_2: R16.2 U3.2 | length 2.8
  Top Layer w0.305: U3.2@333.512,140.564 R16.2@333.512,142.722 ; 333.512,142.043 cw(c334.37,142.043) R16.2@333.764,142.65
NetR17_1: R17.1 U3.12 | length 2.5
  Top Layer w0.305: U3.12@332.862,134.164 332.862,131.856 R17.1@332.969,131.75
NetR18_2: R18.2 U3.3 | length 5.1
  Top Layer w0.305: R18.2@332.002,142.791 ccw(c332.66,142.745) 332.194,142.278 ; R18.2@332.078,142.786 332.078,142.394 ; R18.2@332.306,142.77 ccw(c333.544,142.683) 332.666,141.806 ; U3.3@332.862,140.564 332.862,141.61 332.078,142.394 ; 332.078,142.394 cw(c332.3,142.394) 332.191,142.587 ccw(c332.3,142.394) 332.078,142.394 ; 332.078,142.394 ccw(c331.856,142.394) 331.965,142.587 cw(c331.856,142.394) 332.078,142.394
  other v1: 331.597,142.748
NetR19_1: R19.1 U3.11 | length 3.6
  Top Layer w0.305: R19.1@331.445,131.75 331.445,131.971 332.212,132.739 U3.11@332.212,134.164 ; R19.1@331.673,131.75 cw(c332.76,131.75) 331.991,132.518
NetR20_2: R20.2 U3.4 | length 37.7
  Top Layer w0.381: v1@332.212,138.958 U3.4@332.212,140.564 ; R20.2@362.115,137.438 v1@363.247,137.438 ; R20.2@362.25,137.303 cw(c362.575,136.978) 362.575,137.438 cw(c362.575,137.898) R20.2@362.25,137.572 ; 362.855,137.438 cw(c362.855,136.795) v1@363.31,137.25
  Bottom Layer w0.381: v1(332.359,138.811) 332.359,137.16 ; 332.486,137.033 332.359,137.16 ; v1(363.372,137.312) 363.372,137.058 362.712,136.398 333.121,136.398 332.359,137.16
NetR21_1: R21.1 U3.10 | length 3.2
  Top Layer w0.305: R21.1@329.921,131.75 330.124,131.75 331.562,133.188 U3.10@331.562,134.164
NetR22_2: R22.2 U3.5 | length 42.1
  Top Layer w0.381: v1@331.562,138.903 U3.5@331.562,140.564 ; R22.2@362.013,138.976 v1@363.32,138.976 ; R22.2@362.148,138.841 cw(c362.473,138.516) 362.473,138.976 cw(c362.473,139.435) R22.2@362.148,139.11
  Bottom Layer w0.381: v1(331.47,138.811) 331.47,136.804 332.588,135.687 339.496,135.687 363.169,135.687 364.084,136.601 364.084,138.723 363.83,138.977 v1(363.322,138.977)
NetR27_1: R27.1 U4.5 U5.4 | length 22
  Top Layer w0.381: U5.4@338.231,123.352 338.231,122.779 338.358,122.652 339.217,122.652 ; 338.709,122.652 339.217,122.652 ; 346.37,129.086 cw(c345.927,128.643) 346.553,128.643 cw(c347.179,128.643) 346.736,129.086 ; 346.37,129.893 ccw(c345.927,130.336) 346.553,130.336 ccw(c347.179,130.336) 346.736,129.893 ; 346.553,132.289 cw(c347.289,132.289) R27.1@346.769,132.809 ; 346.553,132.5 cw(c346.861,132.5) R27.1@346.721,132.774 ; 346.553,132.507 U4.5@346.553,129.489 346.553,122.906 346.299,122.652 339.217,122.652
NetR28_1: R28.1 U4.4 U5.5 | length 25.1
  Top Layer w0.381: U5.5@337.581,123.352 337.581,124.191 337.723,124.333 344.805,124.333 ; R28.1@340.759,132.809 cw(c340.433,132.484) 340.893,132.484 cw(c341.353,132.484) R28.1@341.028,132.809 ; R28.1@340.893,132.944 340.893,130.912 341.122,130.683 345.059,130.683 345.283,130.459 U4.4@345.283,129.489 345.283,124.46 345.156,124.333 344.805,124.333 ; 345.1,129.086 cw(c344.657,128.643) 345.283,128.643 cw(c345.909,128.643) 345.466,129.086 ; 345.1,129.893 ccw(c344.657,130.336) 345.283,130.336 ccw(c345.909,130.336) 345.466,129.893 ; 345.283,125.349 cw(c343.984,125.349) 344.903,124.431 344.805,124.333
PWRKEY: P2.4 R5.2 U2.39 | length 26.3
  Top Layer w0.508: R5.2@345.91,158.167 345.91,157.975 346.651,157.234 U2.39@346.651,154 v1@346.651,151.697
  Bottom Layer w0.508: P2.4@327.431,151.13 346.202,151.13 v1(346.71,151.638)
RESET: P2.7 U2.28 | length 29.4
  Top Layer w0.508: v1(353.314,145.669) 353.402,145.757 U2.28@355.592,145.757 ; v1@353.332,145.651 cw(c353.588,145.395) 353.588,145.757
  Bottom Layer w0.508: P2.7@327.431,143.535 329.565,145.669 v1(353.314,145.669)
RF_AN: IPX1.2 J1.1 U2.32 | length 12.1
  Top Layer w0.508: U2.32@355.592,150.157 ccw(c355.633,150.157) 355.633,150.115 cw(c355.633,150.157) U2.32@355.592,150.157
  Top Layer w0.635: U2.32@355.592,150.157 365.439,150.157 J1.1@365.531,150.065 ; 359.279,150.157 cw(c359.279,149.401) IPX1.2@359.813,149.936 ; IPX1.2@360.121,149.936 cw(c360.656,149.401) 360.656,150.157 ; 362.976,150.157 cw(c362.976,149.16) 363.682,149.865
RI: P3.3 R29.1 | length 3.3
  Top Layer w0.635: P3.3@327.457,120.193 328.117,120.853 R29.1@330.479,120.853
RTC_EINT: P3.8 U2.12 | length 16.3
  Top Layer w0.508: v1(337.16,134.722) 337.668,134.722 339.293,136.347 339.293,138.598 U2.12@339.852,139.157 U2.12@339.817,139.192
  Bottom Layer w0.508: P3.8@327.457,132.893 327.685,132.893 329.54,134.747 v1@337.134,134.747
RTC_GPIO0: P3.9 U2.11 | length 21.3
  Top Layer w0.508: U2.11@339.852,140.257 339.901,140.208 v1(341.757,140.208)
  Bottom Layer w0.508: P3.9@327.457,135.433 328.574,135.433 ; P3.9@327.903,135.853 ccw(c328.574,136.18) 328.574,135.433 ; v1(341.757,140.208) 341.721,140.208 341.34,140.589 330.378,140.589 329.59,139.802 329.59,136.449 328.574,135.433
RXD1: P3.5 R17.2 | length 10.2
  Top Layer w0.508: P3.5@327.457,125.273 332.205,125.273 332.967,126.035 R17.2@332.967,130.365
RXD2: P3.7 R21.2 | length 2.5
  Top Layer w0.508: P3.7@327.457,130.353 329.906,130.353 R21.2@329.919,130.365
SIM_CLK: C12.2 R26.2 U2.16 | length 9.3
  Top Layer w0.381: 346.644,135.488 U2.16@346.644,136.398 346.644,134.051 346.837,133.858 348.996,133.858 349.259,133.595 C12.2@349.259,131.343 ; 349.259,132.228 cw(c349.904,132.228) R26.2@349.448,132.684 ; 349.259,133.409 ccw(c349.904,133.409) R26.2@349.448,132.953
SIM_CLKP: R26.1 U4.6 U5.1 | length 27.4
  Top Layer w0.381: U5.1@336.931,120.752 336.931,121.666 337.058,121.793 347.091,121.793 347.726,122.428 U4.6@347.726,129.489 ; 347.726,128.409 cw(c348.684,128.409) 348.006,129.086 ; U4.6@347.726,129.392 U4.6@347.823,129.489 350.088,129.489 350.799,130.2 R26.1@350.799,132.715 ; U4.6@348.006,129.306 cw(c348.449,128.863) 348.449,129.489 cw(c348.449,130.116) U4.6@348.006,129.673 ; R26.1@350.563,132.682 cw(c349.993,132.111) 350.799,132.111
SIM_DATA: C11.2 R27.2 U2.15 | length 6.6
  Top Layer w0.381: C11.2@344.637,131.547 345.161,131.547 345.544,131.93 345.544,133.35 U2.15@345.544,136.398 ; R27.2@345.125,132.801 cw(c344.338,131.888) 345.544,131.888
SIM_RST: C10.1 R28.2 U2.17 | length 21.7
  Top Layer w0.381: 342.684,132.942 342.684,134.201
  Top Layer w0.508: C10.1@339.649,131.572 339.649,133.48 340.662,134.493 341.63,134.493 ; 342.392,136.017 cw(c340.552,136.017) 341.853,134.716 341.63,134.493 ; 342.684,132.942 ccw(c342.306,133.32) 342.841,133.32 342.841,134.055 cw(c343.924,135.138) 342.392,135.138 ; 342.684,134.201 342.392,134.493 ; U2.17@347.744,136.398 347.744,138.285 347.599,138.43 343.027,138.43 342.659,138.062 342.392,137.795 342.392,135.138 ; 341.63,134.493 342.392,134.493 ; 342.392,134.493 342.392,135.138
SIM_VDD: C25.2 U2.18 U4.2 U5.6 | length 41.6
  Top Layer w0.381: U5.6@336.931,123.352 336.931,124.714 337.185,124.968 338.201,124.968 ; 337.926,125.074 ccw(c337.142,125.857) 338.25,125.857 ; C25.2@338.115,127.488 cw(c337.79,127.162) 338.25,127.162 cw(c338.71,127.162) C25.2@338.385,127.488 ; C25.2@338.25,127.622 338.25,125.857 ; 338.963,124.968 cw(c338.963,125.681) 338.25,125.681 338.25,125.857 ; U4.2@342.743,129.489 342.743,125.446 342.265,124.968 338.582,124.968 338.201,124.968 ; 338.201,124.968 ccw(c338.082,125.087) 338.25,125.087 338.25,125.857
  Top Layer w0.508: C25.2@338.25,127.622 337.452,127.622 337.058,128.016 337.058,132.08 341.681,136.525 341.681,138.735 342.519,139.573 348.488,139.573 348.844,139.217 U2.18@348.844,136.398
TXD1: P3.4 R15.2 | length 15.3
  Top Layer w0.508: P3.4@327.457,122.733 333.654,122.733 334.491,123.569 334.491,125.273 ; 334.491,124.104 334.491,125.273 ; R15.2@334.491,130.365 334.491,129.896 334.491,125.273
TXD2: P3.6 R19.2 | length 6.7
  Top Layer w0.508: P3.6@327.457,127.813 330.962,127.813 331.443,128.294 331.443,128.981 ; 331.443,128.575 331.443,128.981 ; R19.2@331.443,130.365 331.443,128.981
UART1_DTR: Q3.3 R11.1 U2.6 | length 24.7
  Top Layer w0.381: R11.1@330.843,155.212 cw(c331.168,154.886) 331.168,155.346 cw(c331.168,155.806) R11.1@330.843,155.481 ; R11.1@330.937,155.346 R11.1@330.708,155.346 ; Q3.3@331.064,153.372 Q3.3@331.145,153.453 ; Q3.3@331.247,153.213 cw(c331.826,152.634) 331.826,153.453 ; Q3.3@331.247,153.58 ccw(c331.554,153.887) 331.554,153.453 ; U2.6@339.852,145.757 340.659,145.757 342.392,147.49 342.392,152.019 340.958,153.453 Q3.3@331.145,153.453 ; 340.602,145.867 ccw(c340.602,146.268) 340.886,145.984 ; R11.1@330.708,155.346 330.692,155.346 330.708,155.33 R11.1@330.708,155.346 ; R11.1@330.708,155.346 331.318,155.346 331.47,155.194 331.47,153.778 Q3.3@331.145,153.453
UART1_RI: Q2.3 R12.1 U2.7 | length 57.9
  Top Layer w0.381: R12.1@332.892,155.156 cw(c332.892,154.696) 333.218,155.021 cw(c333.543,155.346) R12.1@333.083,155.346 ; R12.1@332.892,155.346 334,154.238 341.062,154.238 343.027,152.273 343.027,146.848 cw(c340.487,146.848) 342.283,145.052 v1(341.884,144.653) U2.7@339.856,144.653 ; Q2.3@334.321,118.593 336.169,118.593 336.169,132.22 ; 336.182,132.22 339.115,135.153 ; 339.598,135.636 339.115,135.153 ; U2.7@339.862,144.653 cw(c339.862,144.667) U2.7@339.852,144.657 340.659,144.657 ; v1(340.36,137.516) 340.36,136.398 339.115,135.153
  Bottom Layer w0.381: v1(340.36,137.516) 341.986,137.516 343.306,138.836 ; v1(341.884,144.653) 342.519,144.653 343.522,143.65 343.522,143.062 343.535,143.049 343.535,139.065 343.306,138.836 ; 342.392,137.922 343.306,138.836
UART1_RXD: D6.3 R18.1 U2.2 | length 24
  Top Layer w0.381: R18.1@331.927,144.17 331.106,144.991 331.106,152.163 331.292,152.349 D6.3@335.273,152.349 ; D6.3@335.578,152.654 340.614,152.654 341.63,151.638 341.63,150.495 341.292,150.157 U2.2@339.852,150.157
  Top Layer w0.508: 338.879,150.157 U2.2@339.852,150.157 340.749,150.157
UART1_TXD: D5.3 R16.1 U2.1 | length 16.5
  Top Layer w0.381: D5.3@332.861,147.982 cw(c332.418,147.539) 333.045,147.539 cw(c333.671,147.539) D5.3@333.228,147.982 ; D5.3@332.861,148.399 ccw(c332.418,148.842) 333.045,148.842 ccw(c333.671,148.842) D5.3@333.228,148.399 ; R16.1@333.413,144.196 ccw(c332.953,144.196) 333.278,144.521 ccw(c333.604,144.846) R16.1@333.604,144.386 ; R16.1@333.604,144.196 333.045,144.755 D5.3@333.045,148.19 333.045,150.8 333.502,151.257 U2.1@339.852,151.257
UART2_RXD: D8.3 R22.1 U2.23 | length 18
  Top Layer w0.508: U2.23@355.592,140.257 360.275,140.257 360.629,139.903 ; 360.629,139.56 R22.1@360.629,138.977 ; 363.626,140.259 360.883,140.259 360.629,140.005 360.629,139.903 ; 363.677,140.208 364.49,139.395 364.49,134.525 ; D8.3@363.76,134.366 364.331,134.366 ; D8.3@363.924,134.227 cw(c364.258,133.893) 364.258,134.366 cw(c364.258,134.839) D8.3@363.924,134.505 ; R22.1@360.629,138.977 ccw(c360.568,139.039) R22.1@360.655,139.039 ; R22.1@360.629,138.977 ccw(c360.568,139.039) R22.1@360.655,139.039 ; R22.1@360.629,138.977 ccw(c360.568,139.039) R22.1@360.655,139.039 ; R22.1@360.629,138.977 cw(c360.874,139.222) 360.528,139.222 ccw(c360.874,139.222) R22.1@360.629,138.977 ; R22.1@360.629,138.977 360.629,139.903
UART2_TXD: D7.3 R20.1 U2.22 | length 14.4
  Top Layer w0.508: U2.22@355.592,139.157 359.191,139.157 359.562,138.786 359.562,137.617 359.766,137.414 360.731,137.414 360.731,136.652 361.036,136.347 362.61,136.347 362.814,136.144 362.814,134.569 362.636,134.391 ; D7.3@359.823,134.391 362.636,134.391 ; D7.3@360.052,134.366 D7.3@360.06,134.358 ; 362.763,134.518 362.636,134.391
USB_DN: R13.2 U2.26 | length 5.2
  Top Layer w0.635: U2.26@355.592,143.557 360.078,143.557 R13.2@360.591,144.07
USB_DP: R14.2 U2.25 | length 5
  Top Layer w0.635: U2.25@355.592,142.457 360.466,142.457 R14.2@360.54,142.382
USB_VBUS: C6.1 L3.2 U2.24 | length 44.9
  Top Layer w0.508: 356.229,141.357 U2.24@355.592,141.357 363.849,141.357 365.201,140.005 365.201,133.553 364.084,132.436 364.084,119.431 363.677,119.024 363.677,113.233 363.372,112.928 360.223,112.928 358.75,114.402 C6.1@358.75,115.265 ; 363.677,114.579 363.779,114.478
VCC_BAT: C2.2 C3.1 C4.2 C5.1 C9.1 D4.2 L1.1 R6.2 R25.1 TP1.1 U2.34 U2.35 | length 50.4
  Top Layer w0.762: D4.2@357.175,157.734 357.2,157.759 D4.2@357.251,157.81
  Top Layer w0.889: C4.2@350.304,158.164 350.304,157.859 351.117,157.047 ; U2.35@351.094,154 351.094,155.724 ; 351.977,155.724 351.094,155.724 ; U2.34@352.151,154 352.151,154.704 ; 351.094,155.724 351.117,155.746 351.117,157.047 ; 351.117,157.047 ccw(c351.948,157.047) 351.948,156.216 cw(c351.948,157.047) 351.117,157.047
  Top Layer w1.016: U2.34@352.151,154 352.151,156.216 353.403,157.467 C2.2@353.403,158.164 353.43,158.191 TP1.1@355.244,158.191 D4.2@357.149,158.191 ; 353.127,157.191 ccw(c352.154,158.164) C2.2@353.53,158.164 ; L1.1@353.131,165.195 ccw(c353.863,164.608) 353.2,163.944 ; R6.2@355.409,170.385 355.409,168.262 352.933,165.786 L1.1@352.933,165.354 352.933,164.211 353.771,163.373 362.61,163.373 363.779,162.204 ; C3.1@356.387,161.646 C5.1@360.121,161.646 C9.1@363.779,161.646 C9.1@363.83,161.646 ; D4.2@357.2,157.759 D4.2@357.327,157.759 ; D4.2@357.251,157.81 C3.1@357.251,161.442 ; 357.251,159.278 ccw(c358.095,159.278) D4.2@357.498,158.681
VCC_EN: P2.2 R3.2 U6.1 | length 20.4
  Top Layer w0.508: P2.2@327.431,156.235 329.082,157.886 333.705,157.886 334.772,156.82 336.841,156.82 338.163,158.142 R3.2@338.163,158.164 340.435,158.164 341.224,158.953 341.224,160.172 341.224,161.392 342.163,162.331 U6.1@342.163,163.144
VCC_IN: D2.1 P2.1 | length 3.3
  Top Layer w1.016: D2.1@327.228,161.976 327.431,161.773 P2.1@327.431,158.775
VDD_3.3: C7.1 C20.1 TP2.1 U2.9 U3.14 | length 18.7
  Top Layer w0.635: 335.026,138.43 cw(c335.438,138.018) C7.1@335.616,138.573 ; 335.365,133.842 335.35,133.842 ; TP2.1@335.813,134.29 335.128,133.604 334.391,133.604 334.391,134.239 ; 336.18,138.709 337.16,138.709 337.82,139.37 337.82,141.63 338.647,142.457 U2.9@339.852,142.457 ; 336.761,138.709 cw(c336.761,138.209) C20.1@337.115,138.563 ; C20.1@337.083,138.633 C7.1@335.636,138.633 335.229,138.633 334.391,137.795 334.391,134.239 ; 334.391,134.239 ccw(c335.35,135.198) 335.35,133.842 ; 334.391,134.239 ccw(c335.35,135.198) 335.35,133.842
VDD_EXT: C8.1 C19.1 D5.2 D6.2 D7.2 D8.2 P2.3 R11.2 R12.2 R23.2 TP3.1 U2.40 U3.1 U3.8 | length 90.9
  Top Layer w0.508: 330.048,133.807 330.048,134.264 ; 330.048,134.758 330.048,134.264 ; D5.2@333.995,145.619 cw(c333.995,145.086) 334.372,145.463 ; D5.2@333.995,145.84 336.296,143.539 336.296,143.253 335.255,142.212 C8.1@335.255,142.189 335.255,141.656 U3.1@334.162,140.564 334.162,139.497 330.048,135.382 330.048,134.264 ; 334.264,146.109 334.264,148.59 ; 334.404,148.73 336.298,148.73 D6.2@336.298,150.073 ; 334.661,141.062 ccw(c333.533,142.189) C8.1@335.128,142.189 ; 335.807,148.73 cw(c335.807,148.163) R23.2@336.208,148.564 ; R23.2@336.298,148.653 337.452,148.653 ; 336.298,149.348 cw(c337.32,149.348) D6.2@336.597,150.071 ; C19.1@336.322,143.891 C19.1@336.296,143.891 C19.1@336.423,143.764 ; v2(337.566,147.98) 337.566,148.539 ; D8.2@361.137,133.416 361.188,133.365 D8.2@361.41,133.365
  Top Layer w0.635: P2.3@327.431,153.695 327.559,153.695 330.594,156.731 R11.2@330.71,156.731 R12.2@332.894,156.731 ; 333.237,156.388 R12.2@332.894,156.731 ; 344.98,147.98 ccw(c344.688,148.793) 345.551,148.793 ; D8.2@361.137,133.416 354.518,133.416 353.365,134.569 353.365,139.903 351.774,141.494 347.583,141.494 345.551,143.526 345.551,148.793 ; R12.2@332.894,156.731 333.006,156.731 334.315,155.423 TP3.1@336.728,155.423 337.693,156.388 344.957,156.388 345.551,155.794 U2.40@345.551,154 345.551,148.793
  Bottom Layer w0.508: 337.922,147.93 v2(344.627,147.93)
pads on no net: U2.3 U2.4 U2.5 U2.14 U2.20 U2.42 U3.6 U3.9 U4. U4.3 U5.3 USB1.4 USB1.6 USB1.7 USB1.8 USB1.9

## Polygon pours and split planes (outlines as drawn)
GND on Bottom Layer "Top Overlay-No Net" (solid, remove dead copper, shelved, pour order 1001): 324.51,172.06 324.51,111.912 368.122,111.912 368.122,172.049 cw(c368.209,172.049) 368.148,172.11
GND on Top Layer "Top Overlay-No Net" (solid, remove dead copper, shelved, pour order 1000): 324.51,172.06 324.51,111.912 368.122,111.912 ccw(c368.061,111.974) 368.148,111.974 368.148,172.11

## Keep-outs
Keep-Out Layer:
  lines w0.254: 324.51,111.912 324.51,112.141 324.51,166.916 324.51,172.06 368.122,172.06 368.122,111.912 324.51,111.912